# Altium PCB 题目二PCB.PcbDoc
Units mm, origin at the board's own origin, x right, y up, seen from the top; angles counter-clockwise.
Board outline 78.74 x 71.37 mm, 2 copper layers (Top Layer, Bottom Layer); 26 components, 43 nets, 197 pads, 4 vias.
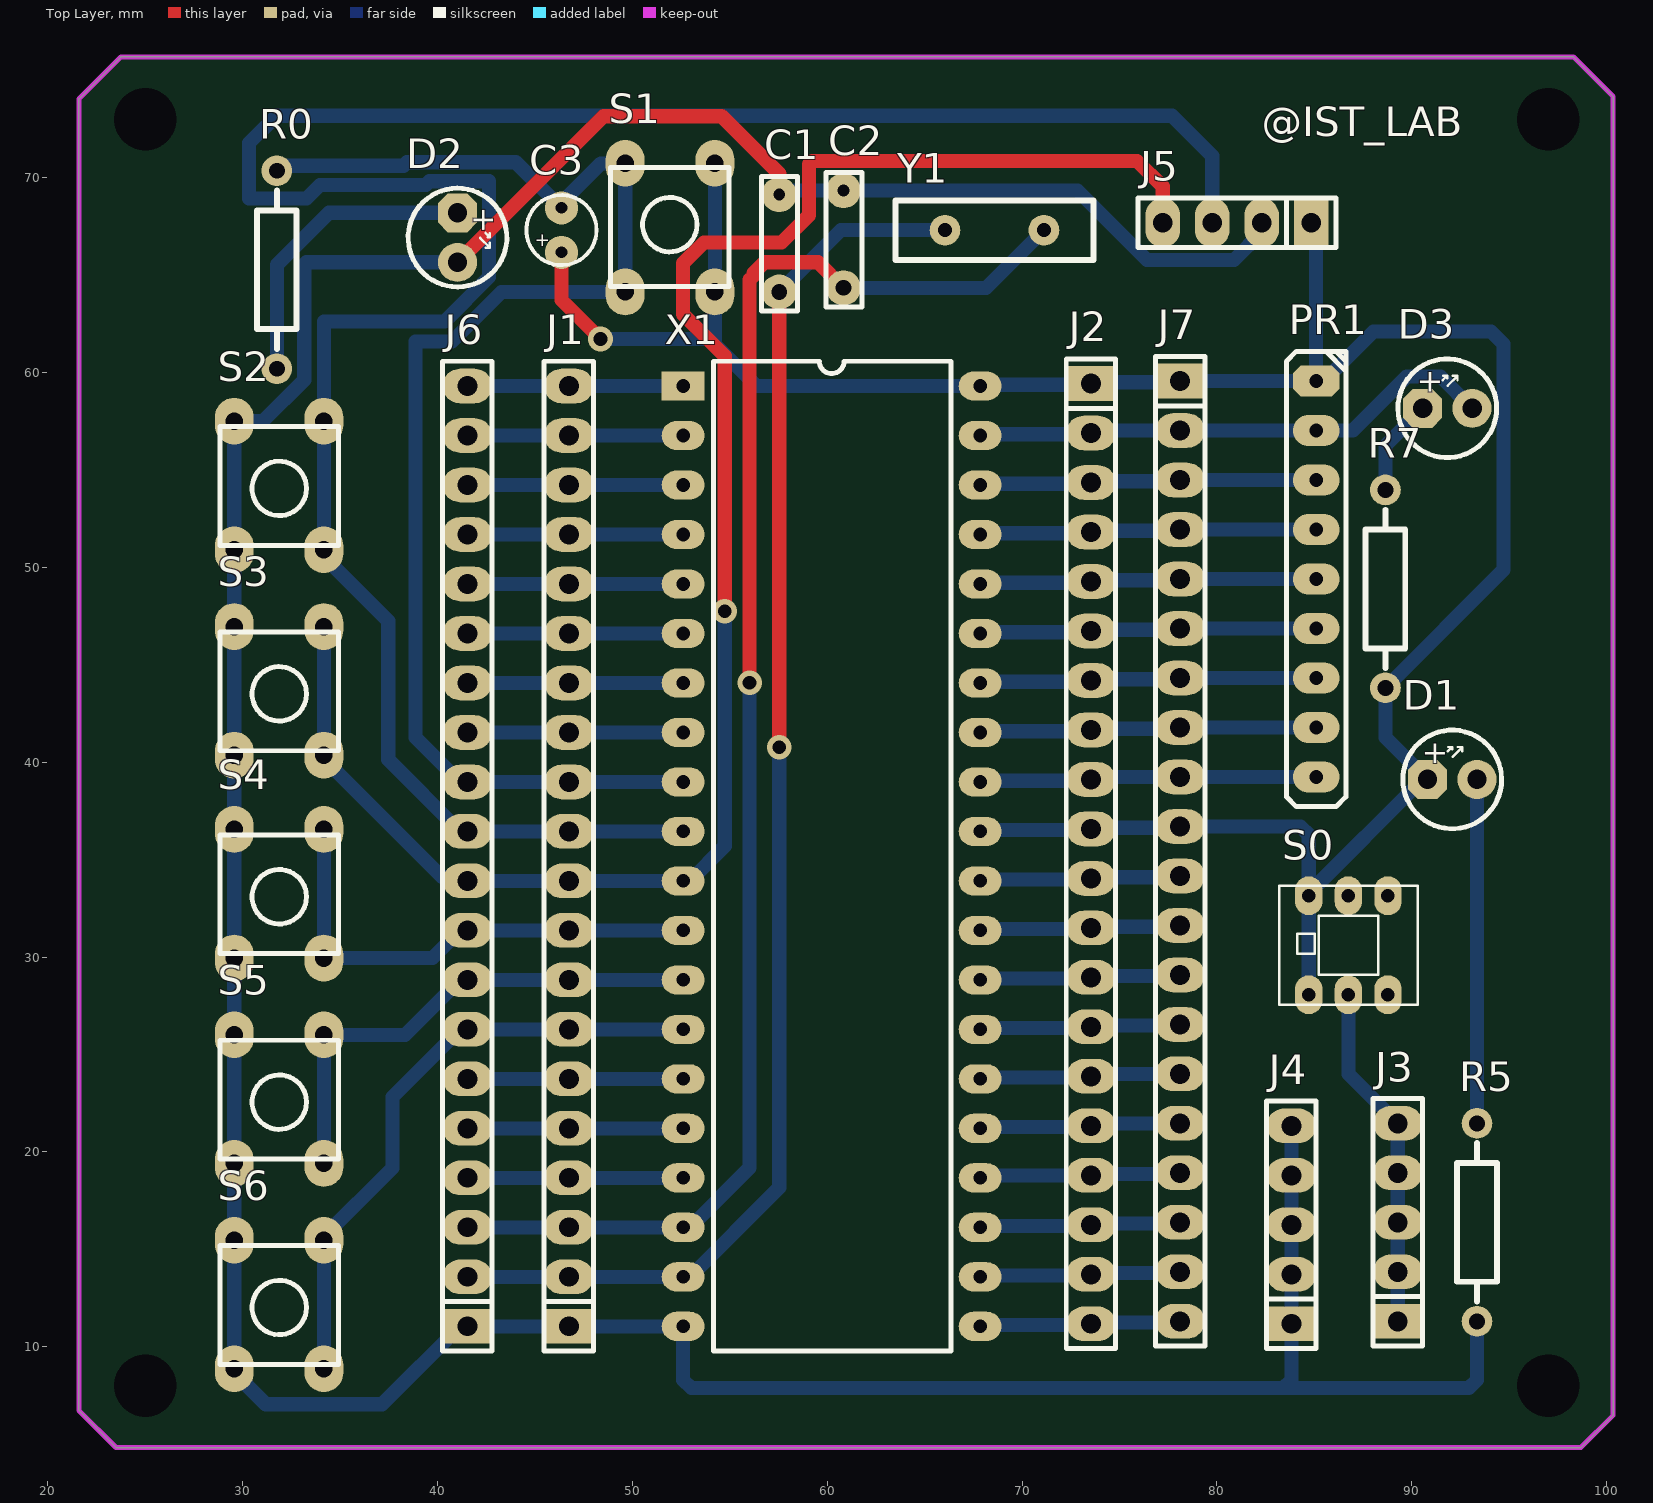
[diagram p0: Top Layer view]
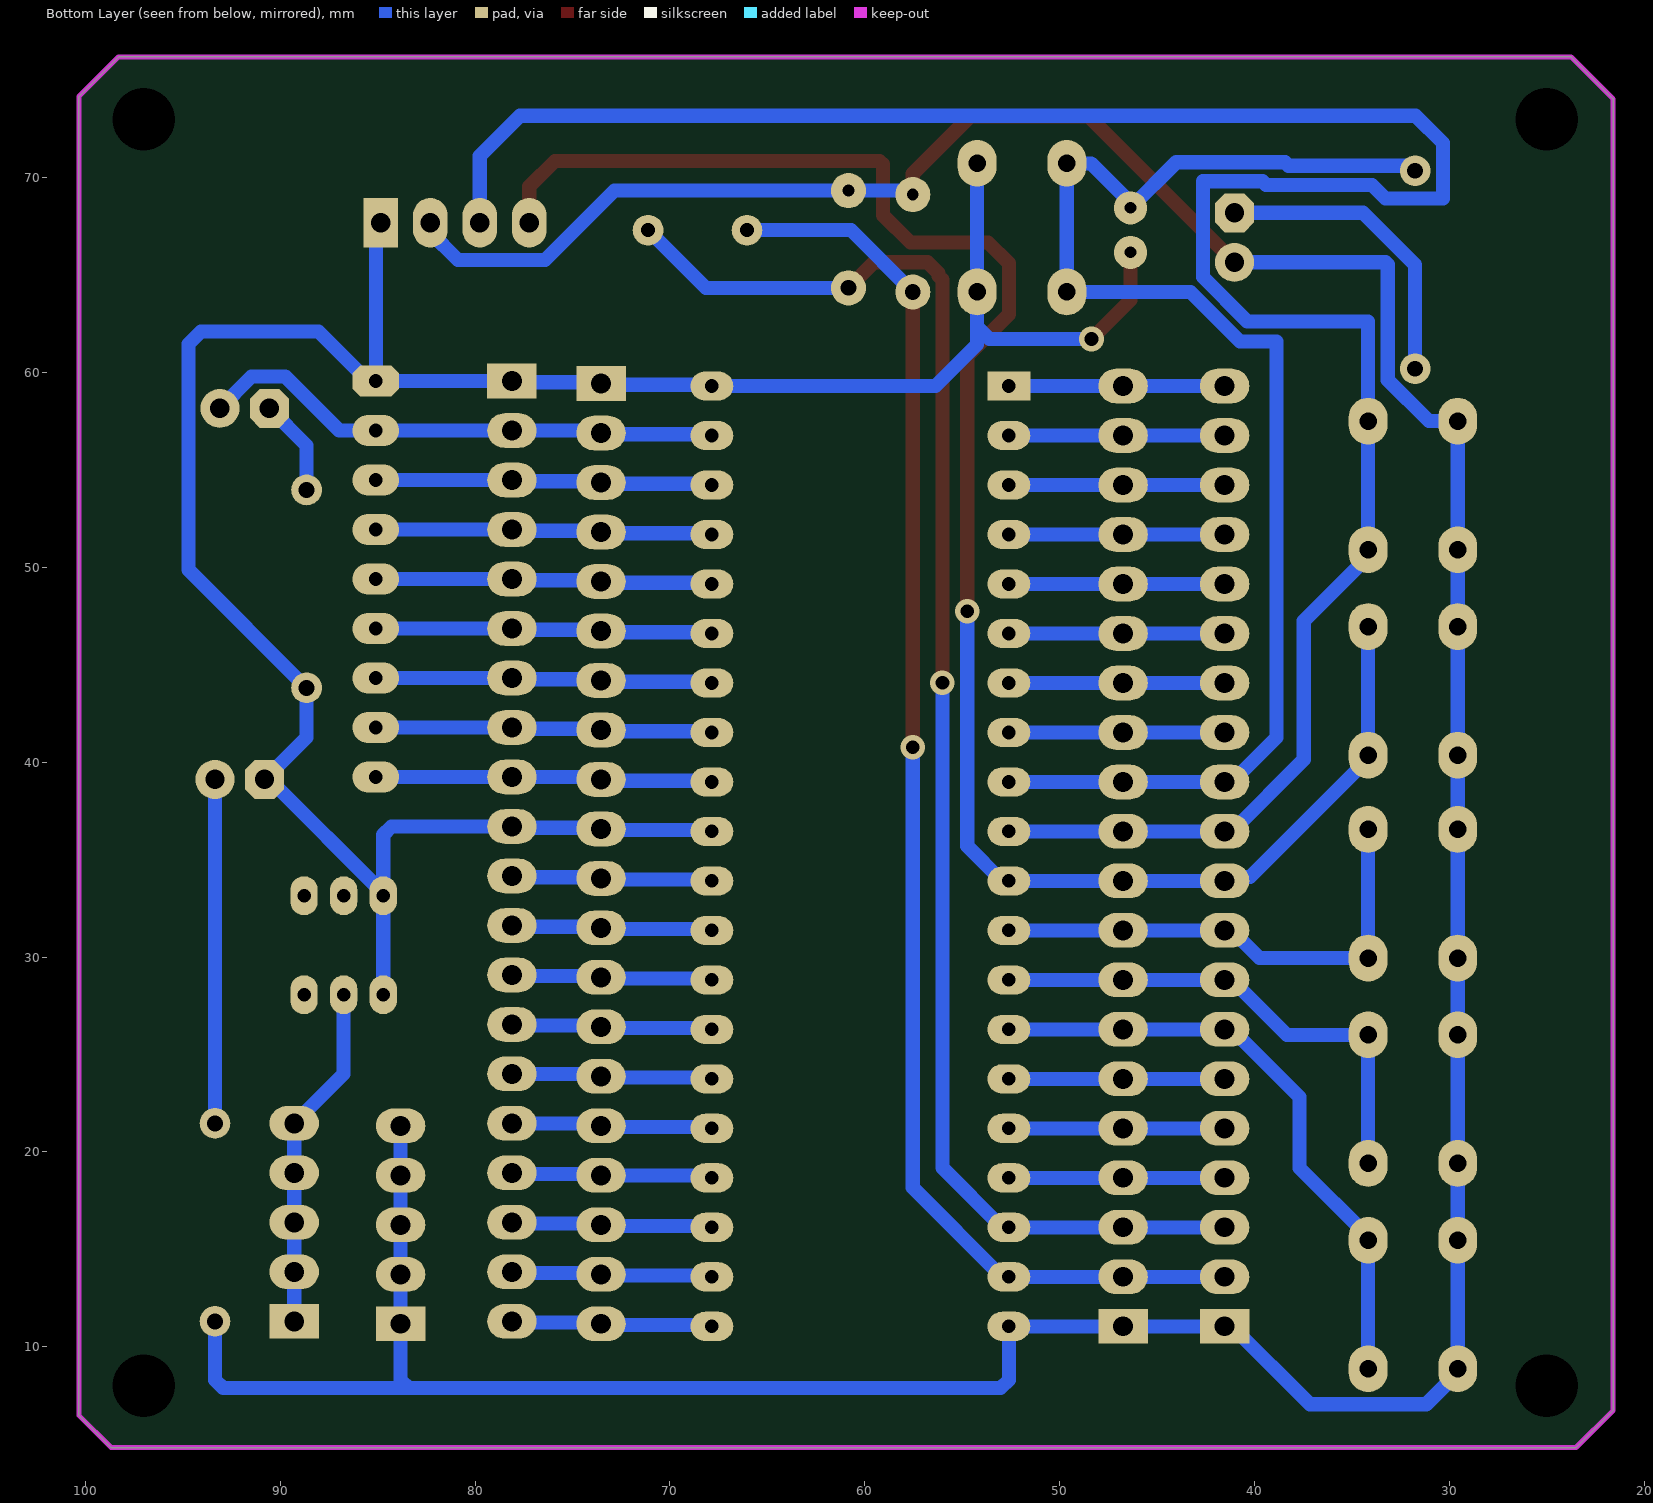
[diagram p1: Bottom Layer view, seen from below]

## Layer stack, top to bottom
Top Solder: solder mask 0.0102, Solder Resist, Dk 3.5
Top Layer: signal copper 0.0356
Dielectric 1: dielectric 0.32, FR-4, Dk 4.8
Bottom Layer: signal copper 0.0356
Bottom Solder: solder mask 0.0102, Solder Resist, Dk 3.5

## Board outline
21.59,6.731 23.495,4.826 98.679,4.826 100.33,6.477 100.33,74.168 98.298,76.2 23.749,76.2 21.59,74.041

## Design rules (kind name [scope] priority, off if disabled: settings)
Clearance [All] p1: gap=0.254 ignorepadtopadclearanceinfootprint=FALSE except(0: Arc-Hole Track-Hole SMDPad-Hole THPad-Hole Via-Hole Fill-Hole Poly-Hole Region-Hole Text-Hole)
PolygonConnect [All] p1: connectstyle=Relief reliefconductorwidth=0.254 reliefentries=4 polygonreliefangle="90 Angle" airgapwidth=0.254
RoutingVias [All] p1: holewidth=0.711 width=1.27 viastyle="Through Hole" minholewidth=0.711 minwidth=1.27 maxholewidth=0.711 maxwidth=1.27
SolderMaskExpansion [All] p1: expansion=0.102 istentingtop=FALSE
Width [All] p1: maxlimit=0.8 minlimit=0.6 preferedwidth=0.725 minimp=50.000000 maximp=50.000000 favimp=50.000000
30 further rules are at their usual default settings.

## Components (designator, comment, footprint, x,y, rotation, side; value= is the part's Value field where it differs from the comment)
C1 "22pf" CAP2 57.531,64.135 r90 top
C2 "22pf" CAP2 60.833,64.342 r90 top
C3 "10uf" CAO1 46.355,67.31 r90 top
D1 "LED" LED2_B 92.075,39.116 r0 top
D2 "LED" LED2_B 41.021,66.929 r270 top
D3 "LED" LED2_B 91.821,58.166 r0 top
J1 "CON20" sip-20 46.736,11.049 r90 top
J2 "CON20" sip-20 73.533,59.436 r270 top
J3 "CON5" sip-5 89.281,11.303 r90 top
J4 "CON5" sip-5 83.82,11.176 r90 top
J5 "CON4" sip-4 84.836,67.691 r180 top
J6 "CON20" sip-20 41.529,11.049 r90 top
J7 "CON20" sip-20 78.105,59.563 r270 top
PR1 "10K" RP1 85.09,59.563 r270 top
R0 "10K" AXIAL0.4 31.75,60.198 r90 top
R5 "1K" AXIAL0.4 93.345,21.463 r270 top
R7 "1K" AXIAL0.4 88.646,53.975 r270 top
S0 "SW-DPDT" SWH7*7 88.773,28.067 r180 top
S1 "SW-PB" SW6*6 49.629,64.139 r90 top
S2 "SW-PB" SW6*6 34.163,57.506 r270 top
S3 "SW-PB" SW6*6 34.163,46.965 r270 top
S4 "SW-PB" SW6*6 34.163,36.551 r270 top
S5 "SW-PB" SW6*6 34.163,26.01 r270 top
S6 "SW-PB" SW6*6 34.163,15.469 r270 top
X1 "STC89C52RC-DIP40" DIP-40 52.603,59.309 r0 top
Y1 "XTAL" XTAL1 71.12,67.31 r270 top

## Footprints (in the part's own frame and the unit in brackets; to place one, negate y for a bottom-side part, rotate by r counter-clockwise, add the part's x,y. Pads: shape width x height; smd on the part's side, far side on the other; paste and mask are expansions set on the pad)
AXIAL0.4 [mil]
  round 62 hole 32: 1(0,0) 2(400,0)
  silkscreen extent 40,-40 360,40
CAO1 [mm]
  round 1.7 hole 0.6: 1(-1.143,0) 2(1.143,0)
  silkscreen extent -1.8,-1.8 1.8,1.8
CAP2 [mm]
  round 1.8 hole 0.8: 1(0,0)
  round 1.8 hole 0.6: 2(5,0)
  silkscreen extent -0.98,-0.95 5.93,0.9
DIP-40 [mm]
  rect 2.2x1.5 hole 0.7: 1(0,0)
  oval 2.2x1.5 hole 0.7: 2(0,-2.54) 3(0,-5.08) 4(0,-7.62) 5(0,-10.16) 6(0,-12.7) 7(0,-15.24) 8(0,-17.78) 9(0,-20.32) 10(0,-22.86) 11(0,-25.4) 12(0,-27.94) 13(0,-30.48) 14(0,-33.02) 15(0,-35.56) 16(0,-38.1) 17(0,-40.64) 18(0,-43.18) 19(0,-45.72) 20(0,-48.26) 21(15.24,-48.26) 22(15.24,-45.72) 23(15.24,-43.18) 24(15.24,-40.64) 25(15.24,-38.1) 26(15.24,-35.56) 27(15.24,-33.02) 28(15.24,-30.48) 29(15.24,-27.94) 30(15.24,-25.4) 31(15.24,-22.86) 32(15.24,-20.32) 33(15.24,-17.78) 34(15.24,-15.24) 35(15.24,-12.7) 36(15.24,-10.16) 37(15.24,-7.62) 38(15.24,-5.08) 39(15.24,-2.54) 40(15.24,0)
  silkscreen extent 1.55,-49.53 13.74,1.27
LED2_B [mm] "5mm"
  oct 2x2 hole 1: 1(-1.27,0)
  round 2 hole 1: 2(1.27,0)
  silkscreen extent -2.53,-2.53 2.53,2.53, body extent -2.8,-2.91 2.55,2.79, height 8.85
RP1 [mm]
  oct 1.6x2.4 hole 0.7: 1(0,0)
  oval 1.6x2.4 hole 0.7: 2(2.54,0) 3(5.08,0) 4(7.62,0) 5(10.16,0) 6(12.7,0) 7(15.24,0) 8(17.78,0) 9(20.32,0)
  silkscreen extent -1.52,-1.52 21.84,1.52
sip-4 [mil]
  rect 70x100 hole 40: 1(0,0)
  oval 70x100 hole 40: 2(100,0) 3(200,0) 4(300,0)
  silkscreen extent -50,-50 350,50
sip-5 [mil]
  rect 70x100 hole 40: 1(0,0)
  oval 70x100 hole 40: 2(100,0) 3(200,0) 4(300,0) 5(400,0)
  silkscreen extent -50,-50 450,50
sip-20 [mil]
  rect 70x100 hole 40: 1(0,0)
  oval 70x100 hole 40: 2(100,0) 3(200,0) 4(300,0) 5(400,0) 6(500,0) 7(600,0) 8(700,0) 9(800,0) 10(900,0) 11(1000,0) 12(1100,0) 13(1200,0) 14(1300,0) 15(1400,0) 16(1500,0) 17(1600,0) 18(1700,0) 19(1800,0) 20(1900,0)
  silkscreen extent -50,-50 1950,50
SW6*6 [mm]
  oval 2.4x2 hole 0.9: 1(0,0) 1(6.6,0) 2(0,-4.6) 2(6.6,-4.6)
  silkscreen extent 0.28,-5.34 6.38,0.76
SWH7*7 [mm]
  oval 1.4x2 hole 0.7: 1(0,0) 2(2.032,0) 3(4.064,0) 4(4.064,-5.08) 5(2.032,-5.08) 6(0,-5.08)
  silkscreen extent -1.52,-5.59 5.59,0.51
XTAL1 [mil]
  round 62 hole 28: 1(0,0) 2(0,-200)
  silkscreen extent -60,-300 60,100

## Part data
C1 C2: library part CAP1
C3: library part CAP3
J1 J2 J3 J4 J5 J6 J7: "Connector"
PR1: library part PRES1
R0 R5 R7: library part RES, "电阻"
Y1: library part CPY

## Free pads (board coordinates)
  round 3.03 hole 3.2: 2(25,73) 4(25,8)
  round 1.524 hole 3.2: 5(97,73) 6(97,8)

## Via types
v1: diameter 1.27, hole 0.711, Top Layer to Bottom Layer, 4 vias

## Nets (pads, with @x,y where several pads share a name; then routed paths per layer and width w, separated by ;. In a path a pad name is that pad's centre, name@x,y a point inside that pad or via, vN(x,y) a via of type N, cw(c..) or ccw(c..) an arc to the next point about the centre after c; other vN are vias at no path point)
GND: C1.2 C2.2 D2.2 J1.1 J4.1 J4.2 J4.3 J4.4 J4.5 J5.2 J6.1 R5.2 S2.2 S3.2 S4.2 S5.2 S6.2 X1.20 | length 203.3
  Top Layer w0.725: D2.2 48.514,73.152 54.585,73.152 57.531,70.206 C1.2
  Bottom Layer w0.725: D2.2 33.274,65.659 33.154,65.539 33.154,59.616 31.043,57.506 29.563,57.506 29.563,50.906 29.563,46.965 29.563,40.365 29.563,36.551 29.563,29.951 29.563,26.01 29.563,19.41 29.563,15.469 29.563,8.869 29.563,8.481 29.337,8.255 29.977,8.255 31.18,7.052 37.151,7.052 41.148,11.049 J6.1 J1.1 X1.20 52.603,8.299 53.028,7.874 83.395,7.874 ; C1.2 57.325,69.341 57.325,69.342 C2.2 72.847,69.342 76.403,65.786 80.882,65.786 82.296,67.2 J5.2 ; J4.5 J4.4 J4.3 J4.2 J4.1 83.82,8.299 83.395,7.874 ; R5.2 93.345,8.299 92.92,7.874 83.395,7.874
NetD1_2: D1.2 R5.1 | length 17.7
  Bottom Layer w0.725: R5.1 D1.2
NetD2_1: D2.1 R0.1 | length 15.7
  Bottom Layer w0.725: R0.1 31.75,65.532 34.417,68.199 D2.1
NetD3_1: D3.1 R7.1 | length 5
  Bottom Layer w0.725: R7.1 88.646,56.261 D3.1
NetJ2_11: J2.11 J7.11 X1.30 | length 10.4
  Bottom Layer w0.725: X1.30 67.907,33.972 73.469,33.972 J2.11 73.596,34.099 78.041,34.099 J7.11
NetJ2_12: J2.12 J7.12 X1.29 | length 10.4
  Bottom Layer w0.725: X1.29 67.907,31.432 73.469,31.432 J2.12 73.596,31.559 78.041,31.559 J7.12
NetJ3_1: J3.1 J3.2 J3.3 J3.4 J3.5 S0.2 | length 17.9
  Bottom Layer w0.725: S0.2 86.741,24.003 88.699,22.045 88.699,21.949 89.185,21.463 J3.5 J3.4 J3.3 J3.2 J3.1
P00: D3.2 J2.2 J7.2 PR1.2 X1.39 | length 27.2
  Bottom Layer w0.725: X1.39 67.907,56.832 73.469,56.832 J2.2 73.66,57.023 J7.2 PR1.2 86.97,57.023 89.738,59.792 91.465,59.792 D3.2
P01: J2.3 J7.3 PR1.3 X1.38 | length 17.4
  Bottom Layer w0.725: X1.38 67.907,54.292 73.469,54.292 J2.3 73.596,54.419 78.041,54.419 J7.3 PR1.3
P02: J2.4 J7.4 PR1.4 X1.37 | length 17.4
  Bottom Layer w0.725: X1.37 67.907,51.752 73.469,51.752 J2.4 73.596,51.88 78.041,51.88 J7.4 PR1.4
P03: J2.5 J7.5 PR1.5 X1.36 | length 17.4
  Bottom Layer w0.725: X1.36 67.907,49.212 73.469,49.212 J2.5 73.596,49.34 78.041,49.34 J7.5 PR1.5
P04: J2.6 J7.6 PR1.6 X1.35 | length 17.4
  Bottom Layer w0.725: X1.35 67.907,46.672 73.469,46.672 J2.6 73.596,46.799 78.041,46.799 J7.6 PR1.6
P05: J2.7 J7.7 PR1.7 X1.34 | length 17.4
  Bottom Layer w0.725: X1.34 67.907,44.133 73.469,44.133 J2.7 73.596,44.259 78.041,44.259 J7.7 PR1.7
P06: J2.8 J7.8 PR1.8 X1.33 | length 17.4
  Bottom Layer w0.725: X1.33 67.907,41.593 73.469,41.593 J2.8 73.596,41.719 78.041,41.719 J7.8 PR1.8
P07: J2.9 J7.9 PR1.9 X1.32 | length 17.4
  Bottom Layer w0.725: X1.32 67.907,39.052 73.469,39.052 J2.9 73.66,39.243 J7.9 PR1.9
P10: J1.20 J6.20 X1.1 | length 11.1
  Bottom Layer w0.725: J6.20 J1.20 X1.1
P11: J1.19 J6.19 X1.2 | length 11.1
  Bottom Layer w0.725: J6.19 J1.19 X1.2
P12: J1.18 J6.18 X1.3 | length 11.1
  Bottom Layer w0.725: J6.18 J1.18 X1.3
P13: J1.17 J6.17 X1.4 | length 11.2
  Bottom Layer w0.725: J6.17 41.783,51.689 41.91,51.562 42.037,51.689 J1.17 X1.4
P14: J1.16 J6.16 X1.5 | length 11.1
  Bottom Layer w0.725: J6.16 J1.16 X1.5
P15: J1.15 J6.15 X1.6 | length 11.1
  Bottom Layer w0.725: J6.15 J1.15 X1.6
P16: J1.14 J6.14 X1.7 | length 11.1
  Bottom Layer w0.725: J6.14 J1.14 X1.7
P17: J1.13 J6.13 X1.8 | length 11.1
  Bottom Layer w0.725: J6.13 J1.13 X1.8
P20: J2.20 J7.20 X1.21 | length 10.4
  Bottom Layer w0.725: X1.21 67.907,11.112 73.469,11.112 J2.20 73.596,11.239 78.041,11.239 J7.20
P21: J2.19 J7.19 X1.22 | length 10.4
  Bottom Layer w0.725: X1.22 67.907,13.652 73.469,13.652 J2.19 73.596,13.779 78.041,13.779 J7.19
P22: J2.18 J7.18 X1.23 | length 10.4
  Bottom Layer w0.725: X1.23 67.907,16.192 73.469,16.192 J2.18 73.596,16.319 78.041,16.319 J7.18
P23: J2.17 J7.17 X1.24 | length 10.4
  Bottom Layer w0.725: X1.24 67.945,18.669 68.072,18.796 J2.17 73.596,18.86 78.041,18.86 J7.17
P24: J2.16 J7.16 X1.25 | length 10.4
  Bottom Layer w0.725: X1.25 67.907,21.273 73.469,21.273 J2.16 73.66,21.463 J7.16
P25: J2.15 J7.15 X1.26 | length 10.4
  Bottom Layer w0.725: X1.26 67.907,23.812 73.469,23.812 J2.15 73.66,24.003 J7.15
P26: J2.14 J7.14 X1.27 | length 10.4
  Bottom Layer w0.725: X1.27 67.907,26.352 73.469,26.352 J2.14 73.596,26.479 78.041,26.479 J7.14
P27: J2.13 J7.13 X1.28 | length 10.4
  Bottom Layer w0.725: X1.28 67.907,28.892 73.469,28.892 J2.13 73.596,29.019 78.041,29.019 J7.13
P32: J1.9 J6.9 S4.1 X1.12 | length 25.6
  Bottom Layer w0.725: S4.1@34.163,36.551 34.163,29.951 39.73,29.951 41.148,31.369 J6.9 J1.9 X1.12
P33: J1.8 J6.8 S5.1 X1.13 | length 26.2
  Bottom Layer w0.725: S5.1@34.163,19.41 34.163,26.01 38.329,26.01 41.148,28.829 J6.8 J1.8 X1.13
P34: J1.7 J6.7 S6.1 X1.14 | length 31.8
  Bottom Layer w0.725: S6.1@34.163,8.869 34.163,15.469 34.163,15.669 37.677,19.182 37.677,22.818 41.148,26.289 J6.7 J1.7 X1.14
P35: J1.6 J6.6 X1.15 | length 11.1
  Bottom Layer w0.725: J6.6 J1.6 X1.15
P36: J1.5 J6.5 X1.16 | length 11.1
  Bottom Layer w0.725: J6.5 J1.5 X1.16
P37: J1.4 J6.4 X1.17 | length 11.1
  Bottom Layer w0.725: J6.4 J1.4 X1.17
RST: C3.2 J1.12 J6.12 R0.2 S1.1 X1.9 | length 73.6
  Bottom Layer w0.725: R0.2 31.75,70.485 31.877,70.612 31.916,70.612 38.243,70.612 38.425,70.795 44.013,70.795 C3.2 46.355,68.717 48.377,70.739 49.629,70.739 49.629,64.139 43.273,64.139 40.729,61.595 38.862,61.595 38.862,41.275 41.148,38.989 J6.12 J1.12 X1.9
RXD: J1.11 J5.3 J6.11 S2.1 X1.10 | length 124.8
  Bottom Layer w0.725: X1.10 46.99,36.449 46.863,36.576 J1.11 J6.11 41.148,36.449 37.465,40.132 37.465,47.244 34.163,50.546 34.163,50.906 34.163,57.506 34.163,62.617 40.366,62.617 42.647,64.897 42.647,69.816 39.59,69.816 39.395,69.621 33.96,69.621 33.274,68.936 30.328,68.936 30.328,71.78 31.725,73.177 77.699,73.177 79.756,71.12 J5.3
TXD: J1.10 J5.4 J6.10 S3.1 X1.11 | length 92.2
  Top Layer w0.725: v1(54.737,47.752) 54.737,60.858 52.603,62.992 52.603,65.608 53.67,66.675 57.658,66.675 59.055,68.072 59.055,70.688 59.233,70.866 75.895,70.866 77.216,69.545 J5.4
  Bottom Layer w0.725: S3.1@34.163,46.965 34.163,40.365 34.163,40.165 40.217,34.11 41.328,34.11 J6.10 J1.10 X1.11 52.953,33.909 54.737,35.693 v1(54.737,47.752)
VCC: C3.1 D1.1 J2.1 J2.10 J5.1 J7.1 J7.10 PR1.1 R7.2 S0.3 S0.4 S1.2 X1.31 X1.40 | length 131.8
  Top Layer w0.725: C3.1 46.355,63.729 v1(48.362,61.722) ; PR1.1@84.836,59.563 PR1.1
  Bottom Layer w0.725: v1(48.362,61.722) 53.594,61.722 54.229,62.357 ; S1.2@54.229,70.739 54.229,64.139 54.229,62.357 ; X1.31 67.907,36.512 73.469,36.512 J2.10 73.596,36.639 78.041,36.639 J7.10 84.284,36.703 84.709,36.278 S0.4@84.709,33.277 ; S0.3 S0.4 S0.4@84.709,33.277 ; J5.1 84.709,67.691 85.09,67.31 PR1.1 ; 54.229,62.357 54.229,61.443 56.363,59.309 X1.40 67.907,59.372 73.469,59.372 J2.1 73.596,59.499 78.041,59.499 J7.1 PR1.1 ; S0.4@84.709,33.277 90.548,39.116 D1.1 88.646,41.275 R7.2 94.708,49.877 94.708,61.459 94.063,62.103 88.03,62.103 85.49,59.563 PR1.1
X1: C1.1 J1.2 J6.2 X1.19 Y1.2 | length 73.7
  Top Layer w0.725: v1(57.531,40.767) C1.1
  Bottom Layer w0.725: J6.2 J1.2 X1.19 52.953,13.589 57.531,18.167 v1(57.531,40.767) ; C1.1 60.706,67.31 Y1.2
X2: C2.1 J1.3 J6.3 X1.18 Y1.1 | length 78.7
  Top Layer w0.725: v1(56.014,44.076) 56.014,64.763 56.134,64.883 56.205,64.953 56.205,65.095 56.769,65.659 59.516,65.659 C2.1
  Bottom Layer w0.725: J6.3 J1.3 X1.18 52.953,16.129 56.014,19.19 v1(56.014,44.076) ; C2.1 68.152,64.342 Y1.1
pads on no net: S0.1 S0.5 S0.6

## Keep-outs
Keep-Out Layer:
  the board outline again, w0.254

## Silkscreen, mask and mechanical layers (free items; w line width, h text height)
Top Overlay:
  text "@IST_LAB" at 82.296,72.136 h1.52

## Text inside footprints (layer, text, board x,y; h text height)
C3: Top Overlay "+" at 45.68,66.385 h0.7 r90
D1: Top Overlay "+" at 90.5,39.954 h1.2
D2: Top Overlay "+" at 41.859,68.504 h1.2 r270
D3: Top Overlay "+" at 90.246,59.004 h1.2